# Allegro board FIBER-E1-PWR_01v2.brd
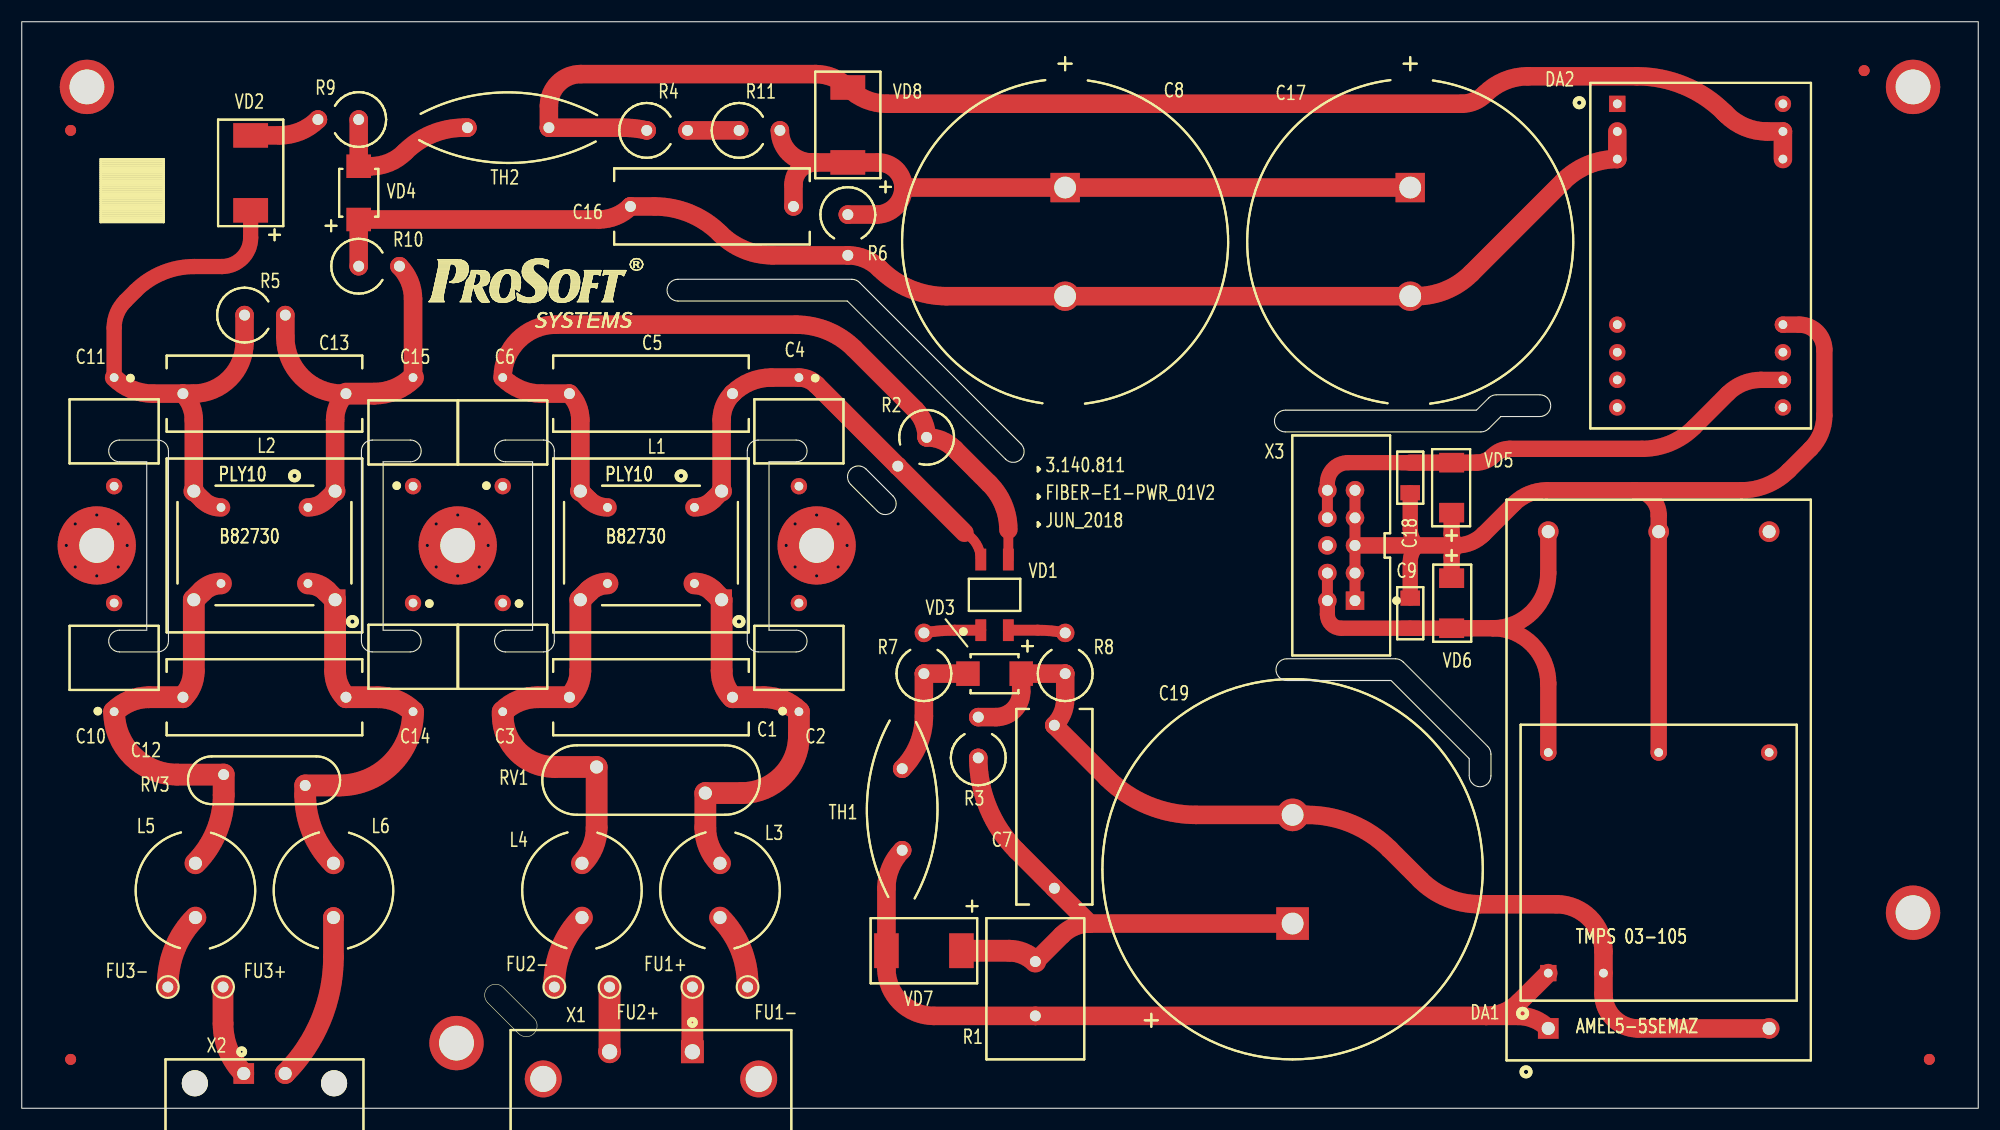
[diagram p0: board, top side]
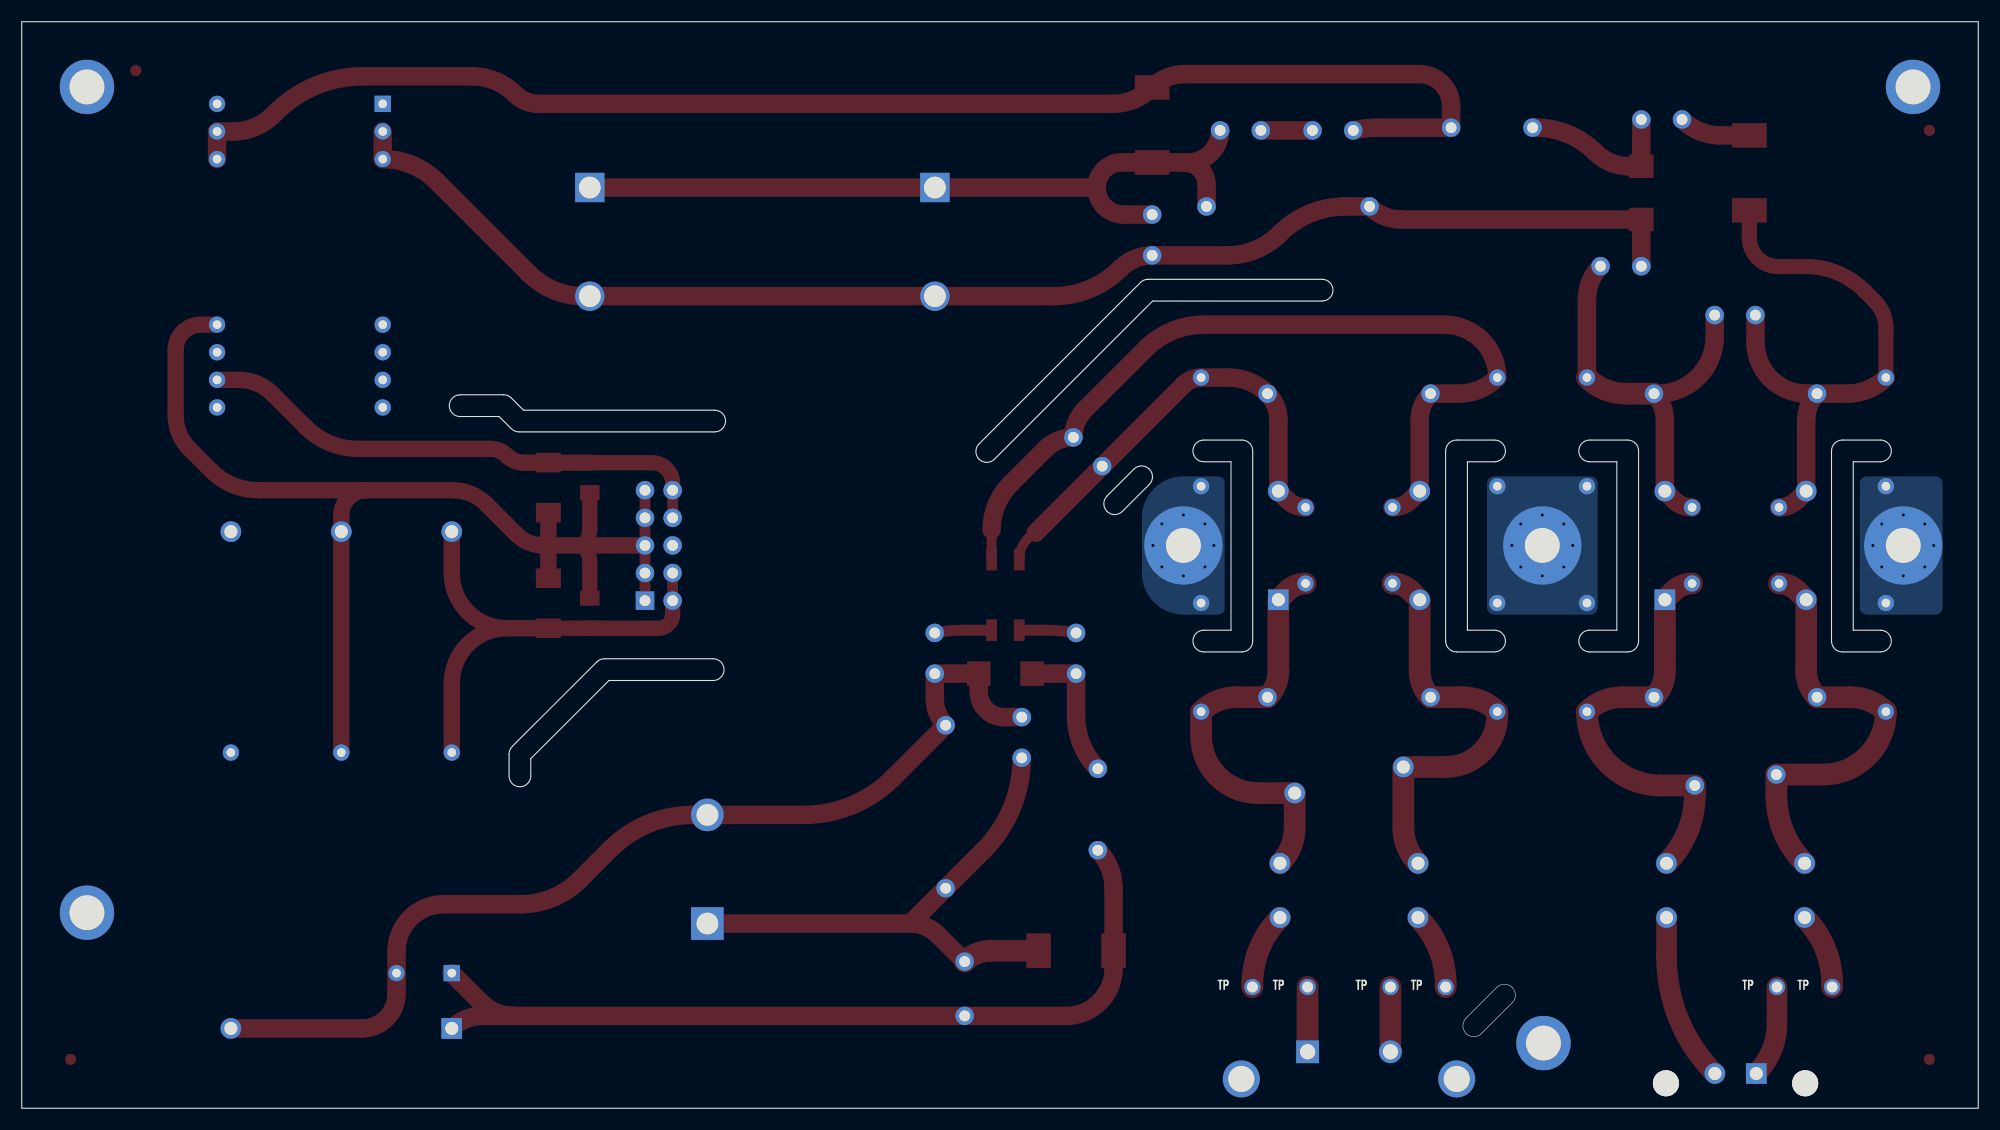
[diagram p1: board, bottom side, seen from below]

Outline 180 x 100 mm; copper layers: TOP, BOTTOM. Coordinates in mm from the lower left corner of the outline.
Outline path: rectangle 0,0 180,100 ; 9,61.5 12.5,61.5 arc(13.21,61.21) 13.5,60.5 13.5,43 arc(13.21,42.29) 12.5,42 9,42 arc(8,43) 9,44 11.5,44 11.5,59.5 9,59.5 arc(8,60.5) 9,61.5 ; 31.25,60.5 arc(31.54,61.21) 32.25,61.5 35.75,61.5 arc(36.75,60.5) 35.75,59.5 33.25,59.5 33.25,44 35.75,44 arc(36.75,43) 35.75,42 32.25,42 arc(31.54,42.29) 31.25,43 31.25,60.5 ; 42.88,11.12 arc(43.59,11.41) 44.29,11.12 47.12,8.29 arc(47.41,7.59) 47.12,6.88 arc(46.41,6.59) 45.71,6.88 42.88,9.71 arc(42.59,10.41) 42.88,11.12 ; 44.5,61.5 48,61.5 arc(48.71,61.21) 49,60.5 49,43 arc(48.71,42.29) 48,42 44.5,42 arc(43.5,43) 44.5,44 47,44 47,59.5 44.5,59.5 arc(43.5,60.5) 44.5,61.5 ; 60.37,76.3 76.37,76.3 arc(76.76,76.22) 77.09,75.99 91.92,61.15 arc(92.22,60.45) 91.92,59.74 arc(91.22,59.45) 90.51,59.74 75.95,74.3 60.37,74.3 arc(59.37,75.3) 60.37,76.3 ; 66.75,60.5 arc(67.04,61.21) 67.75,61.5 71.25,61.5 arc(72.25,60.5) 71.25,59.5 68.75,59.5 68.75,44 71.25,44 arc(72.25,43) 71.25,42 67.75,42 arc(67.04,42.29) 66.75,43 66.75,60.5 ; 76.27,58.83 arc(76.97,59.12) 77.68,58.83 80.16,56.35 arc(80.45,55.64) 80.16,54.94 arc(79.45,54.64) 78.74,54.94 76.27,57.41 arc(75.97,58.12) 76.27,58.83 ; 116.25,64.25 133.84,64.25 134.94,65.36 arc(135.27,65.58) 135.66,65.66 139.66,65.66 arc(140.66,64.66) 139.66,63.66 136.08,63.66 134.97,62.55 arc(134.64,62.33) 134.25,62.25 116.25,62.25 arc(115.25,63.25) 116.25,64.25 ; 116.39,41.37 126.39,41.37 arc(126.78,41.29) 127.11,41.06 134.86,33.31 arc(135.09,32.98) 135.17,32.59 135.17,30.59 arc(134.17,29.59) 133.17,30.59 133.17,32.18 125.98,39.37 116.39,39.37 arc(115.39,40.37) 116.39,41.37

## Design rules (mm)
nets with their own width: min track width 2; nets GND_EARTH

## Placement (name value [footprint] x y rotation side)
C1  0.22uF  [CAPRR1500W80L1800T700H1250N]  57.89 37.83 0 top
C2  470pF  [CAPRR1000W55L700T400H700N]  71.5 41.5 90 top
C3  470pF  [CAPRR1000W55L700T400H700N]  44.25 41.5 270 top
C4  470pF  [CAPRR1000W55L700T400H700N]  71.5 62.25 270 top
C5  0.22uF  [CAPRR1500W80L1800T700H1250N]  57.89 65.77 0 top
C6  470pF  [CAPRR1000W55L700T400H700N]  44.25 62.25 90 top
C7  0.22uF  [CAPRR1500W80L1800T700H1250N]  95 27.75 270 top
C8  4700uF  [CAPPRR1000W150L3000T3000H4000N]  95.99 79.74 270 top
C9  1uF  [CAPC3216X150N]  127.74 45.56 90 top
C10  470pF  [CAPRR1000W55L700T400H700N]  8.5 41.5 90 top
C11  470pF  [CAPRR1000W55L700T400H700N]  8.5 62.25 270 top
C12  0.22uF  [CAPRR1500W80L1800T700H1250N]  22.33 37.83 180 top
C13  0.22uF  [CAPRR1500W80L1800T700H1250N]  22.33 65.77 180 top
C14  470pF  [CAPRR1000W55L700T400H700N]  36 41.5 270 top
C15  470pF  [CAPRR1000W55L700T400H700N]  36 62.25 90 top
C16  0.22uF  [CAPRR1500W80L1800T700H1250N]  63.5 83 0 top
C17  4700uF  [CAPPRR1000W150L3000T3000H4000N]  127.74 79.74 270 top
C18  1uF  [CAPC3216X150N]  127.74 58.03 270 top
C19  470uF  [CAPPRR1000W55L3500T3500H5000N]  116.92 22 90 top
DA1  AMEL5-5SEMAZ  [DIP1016P5228X1780-5N]  150.6 30.21 90 top
DA2  AM3T-4805SH35Z  [DIP254P1524X1020-24N]  154.41 78.47 0 top
FIBER-E1-PWR_01V2  SILK_TEXT  [TEXT]  93.98 55.88 0 top
FU1+  TP  [KP_W150H100]  61.7 11.16 0 top
FU1-  TP  [KP_W150H100]  66.78 11.16 0 top
FU2+  TP  [KP_W150H100]  54.08 11.16 0 top
FU2-  TP  [KP_W150H100]  49 11.16 0 top
FU3+  TP  [KP_W150H100]  18.52 11.16 0 top
FU3-  TP  [KP_W150H100]  13.44 11.16 0 top
JUN_2018  SILK_TEXT  [TEXT]  93.98 53.34 0 top
L1  1m  [FIL_PLY10]  57.89 51.8 180 top
L2  1m  [FIL_PLY10]  22.33 51.8 180 top
L3  22uH  [INDRR500W65L1100T1100H1150N]  64.24 20.05 90 top
L4  22uH  [INDRR500W65L1100T1100H1150N]  51.54 20.05 90 top
L5  22uH  [INDRR500W65L1100T1100H1150N]  15.98 20.05 90 top
L6  22uH  [INDRR500W65L1100T1100H1150N]  28.68 20.05 90 top
MH1  3.2  [MTG720H320]  6.9 51.8 0 top
MH2  3.2  [MTG720H320]  40.11 51.8 0 top
MH3  3.2  [MTG720H320]  73.13 51.8 0 top
NOREF  -  [unnamed]  40 6 0 top
NOREF#2  -  [unnamed#2]  169.5 95.5 0 top
NOREF#3  -  [#3]  40 6 90 top
NOREF#4  -  [unnamed#2]  4.5 4.5 0 top
NOREF#5  -  [#3]  40 6 0 top
NOREF#6  -  [#3]  121.39 51.8 90 top
NOREF#7  -  [unnamed]  6 94 0 top
NOREF#8  -  [unnamed]  174 18 0 top
NOREF#9  -  [#3]  174 18 90 top
NOREF#10  -  [#3]  6 94 0 top
NOREF#11  -  [unnamed#2]  175.5 4.5 0 top
NOREF#12  -  [#3]  121.39 51.8 0 top
NOREF#13  -  [#3]  0 0 90 top
NOREF#14  -  [#3]  70.8 -4.8 90 top
NOREF#15  -  [unnamed]  174 94 0 top
NOREF#16  -  [#3]  0 100 0 top
NOREF#17  -  [unnamed#2]  4.5 90 0 top
NOREF#18  -  [#3]  6 94 90 top
R1  5.1k  [RESAD500W80L1300D900N]  93.25 11 270 top
R2  1M  [RESAD2000W60L1550D500N]  83.25 61.75 45 top
R3  1M  [RESAD2000W60L1550D500N#2]  88 32.25 270 top
R4  510  [RESAD2250W80L1600D505N]  57.5 90 180 top
R5  1M  [RESAD2000W60L1550D500N#2]  20.5 73 180 top
R6  1M  [RESAD2000W60L1550D500N#2]  76 82.25 90 top
R7  510  [RESAD2250W80L1600D505N]  83 40 270 top
R8  510  [RESAD2250W80L1600D505N]  96 40 270 top
R9  5.1  [RESAD2250W80L1600D505N]  31 91 0 top
R10  5.1  [RESAD2250W80L1600D505N]  31 77.5 180 top
R11  510  [RESAD2250W80L1600D505N]  66 90 180 top
RV1  JVR-20N391K  [VAR_JVR-20N391K]  57.89 30.21 180 top
RV3  JVR-14N820K  [VAR_JVR-14N820K]  22.33 30.21 0 top
SILK1  SILK_LOGO  [PROSOFT_LOGO_20X6_LINES]  36.83 71.12 0 top
SILK2  SILK_MARK  [MARKING_STICKER_6X6MM_LINES]  10.16 84.45 0 top
TH1  7  [RESRB750W80L1750T650H2300]  81 27.5 90 top
TH2  7  [RESRB750W80L1750T650H2300]  44.75 90.25 180 top
UNK3.140.811  SILK_TEXT  [TEXT]  93.98 58.42 0 top
VD1  MB8S  [SOIC254P670X270-4N]  89.5 47.25 90 top
VD2  S3M  [DIOM7959X265N]  21.06 86.09 270 top
VD3  P6SMB400A  [DIOM5436X230N]  89.5 40 0 top
VD4  SMBJ48A  [DIOM5436X260N]  31 84.25 270 top
VD5  SM6T6V8A  [DIOM5336X265N]  131.55 57.12 270 top
VD6  SM6T6V8A  [DIOM5336X265N]  131.55 46.48 90 top
VD7  S3M  [DIOM7959X265N]  83 14.5 0 top
VD8  S3M  [DIOM7959X265N]  76 90.5 270 top
X1  220VAC  [PHOENIX_1806229]  61.7 5.2 0 top
X2  48VDC  [PHOENIX_1827868]  20.43 3.2 0 top
X3  IDC-10M  [SHDR0S254P5X2_2025X900X900]  122.66 46.72 90 top

## Library data of the parts
C1-C7 C9-C16 C18 = CAPACITOR
C8 C17 C19 = CAPACITOR_POL
DA1 = AMEL5_xSxMAZ_2
DA2 = AM3T_SH35Z_3
FIBER-E1-PWR_01V2 JUN_2018 UNK3.140.811 = SILK_TEXT
FU1+ FU1- FU2+ FU2- FU3+ FU3- = TP
L1 L2 = PLY10_1
L3-L6 = INDUCTOR
MH1-MH3 = MH_VIAS
R1 = R_5W
R2 R3 R5 R6 = R_0: alternate symbols: (RESAD375W80L505D505N)
R4 R7-R11 = R_2W: alternate symbols: (RESAD375W80L505D505N)
RV1 RV3 = VARISTOR
SILK1 = SILK_LOGO: alternate symbols: (PROSOFT_LOGO_3_10,PROSOFT_LOGO_30X10,PROSOFT_LOGO_50X16,PROSOFT_LOGO_60X20,PROSOFT_LOGO_70X23,PROSOFT_LOGO_80X26,PROSOFT_LOGO_92X30,PROSOFT_LOGO_20X6)
SILK2 = SILK_MARK: alternate symbols: (MARKING_STICKER_6X20MM,MARKING_STICKER_6X20MM_LINES,MARKING_STICKER_6X6MM,MARKING_STICKER_7X7MM)
TH1 TH2 = thermistor
VD1 = DIOD_MOST_MB8S
VD2 VD7 VD8 = DIODE
VD3 = SUPRESSOR_POL_0
VD4 = SUPRESSOR_POL_2
VD5 VD6 = SUPRESSOR_POL
X1 = CONN2_SHIELD_3
X2 = CONN2_3
X3 = CONN10: alternate symbols: (IDC10M_EDGE)

## Footprints (pads in the part's own frame, mm; a bottom-side part is the same pattern mirrored in y, then rotated)
CAPC3216X150N
  rect 1.4x1.8 smd: 1(-1.385,0) 2(1.385,0)
CAPPRR1000W55L3500T3500H5000N
  rect 3x3 hole 2: 1(-5,0)
  round 3 hole 2: 2(5,0)
CAPPRR1000W150L3000T3000H4000N
  rect 2.7x2.7 hole 2: 1(-5,0)
  round 2.7 hole 2: 2(5,0)
CAPRR1000W55L700T400H700N
  round 1.5 hole 0.8: 1(-5,0) 2(5,0)
CAPRR1500W80L1800T700H1250N
  round 1.7 hole 1: 1(-7.5,0) 2(7.5,0)
DIOM5336X265N
  rect 1.8x2.3 smd: 1(-2.302,0) 2(2.302,0)
DIOM5436X230N
  rect 2.16x2.26 smd: 1(-2.45,0) 2(2.45,0)
DIOM5436X260N
  rect 2.16x2.26 smd: 1(-2.45,0) 2(2.45,0)
DIOM7959X265N
  rect 2.26x3.2 smd: 1(-3.45,0) 2(3.45,0)
DIP254P1524X1020-24N
  rect 1.5x1.5 hole 0.8: 1(-7.62,13.97)
  round 1.5 hole 0.8: 2(-7.62,11.43) 3(-7.62,8.89) 9(-7.62,-6.35) 10(-7.62,-8.89) 11(-7.62,-11.43) 12(-7.62,-13.97) 13(7.62,-13.97) 14(7.62,-11.43) 15(7.62,-8.89) 16(7.62,-6.35) 22(7.62,8.89) 23(7.62,11.43) 24(7.62,13.97)
DIP1016P5228X1780-5N
  rect 1.9x1.9 hole 1.2: 1(-22.86,10.16)
  rect 1.5x1.5 hole 0.8: 1-1(-17.77,10.16)
  round 1.9 hole 1.2: 2(-22.86,-10.16) 3(22.86,10.16) 4(22.86,0) 5(22.86,-10.16)
  round 1.5 hole 0.8: 2-1(-17.77,5.08) 3-1(2.53,-10.16) 4-1(2.53,0) 5-1(2.53,10.16)
FIL_PLY10
  rect 1.9x1.9 hole 1.2: 1(-6.5,5)
  round 1.5 hole 0.8: 1-1(-4,-3.5) 2-1(4,-3.5) 3-1(4,3.5) 4-1(-4,3.5)
  round 1.9 hole 1.2: 2(-6.5,-5) 3(6.5,-5) 4(6.5,5)
INDRR500W65L1100T1100H1150N
  round 1.9 hole 1.2: 1(-2.5,0) 2(2.5,0)
KP_W150H100
  round 1.5 hole 1: 1(0,0)
MTG720H320
  round 7.2 hole 3.2: 1(0,0)
PHOENIX_1806229
  rect 2.1x2.1 hole 1.4: 1(0,0)
  round 2.1 hole 1.4: 2(-7.62,0)
  round 3.4 hole 2.4: SHIELD1(-13.72,-2.5) SHIELD2(6.1,-2.5)
PHOENIX_1827868
  round 2.4 hole 2.4 unplated: (-4.5,-0.9) (8.31,-0.9)
  rect 1.9x1.9 hole 1.2: 1(0,0)
  round 1.9 hole 1.2: 2(3.81,0)
RESAD500W80L1300D900N
  round 1.7 hole 1: 1(-2.5,0) 2(2.5,0)
RESAD2000W60L1550D500N
  round 1.7 hole 1: 1(-3.75,0) 2(0,0)
RESAD2000W60L1550D500N#2
  round 1.7 hole 1: 1(-3.75,0) 2(0,0)
RESAD2250W80L1600D505N
  round 1.7 hole 1: 1(-3.75,0) 2(0,0)
RESRB750W80L1750T650H2300
  round 1.7 hole 1: 1(-3.75,0) 2(3.75,0)
SHDR0S254P5X2_2025X900X900
  rect 1.7x1.7 hole 1: 1(0,0)
  round 1.7 hole 1: 2(0,2.54) 3(2.54,0) 4(2.54,2.54) 5(5.08,0) 6(5.08,2.54) 7(7.62,0) 8(7.62,2.54) 9(10.16,0) 10(10.16,2.54)
SOIC254P670X270-4N
  rect 2x1 smd: 1(-3.25,1.27) 2(-3.25,-1.27) 3(3.25,-1.27) 4(3.25,1.27)
unnamed
  round 5 hole 3.2: 1(0,0)
unnamed#2
  round 1 smd: (0,0) (0,0)
VAR_JVR-14N820K
  round 1.7 hole 1: 1(-3.75,0.5) 2(3.75,-0.5)
VAR_JVR-20N391K
  round 1.9 hole 1.2: 1(-5,1.2) 2(5,-1.2)

## Nets
GND: C9.2 C18.2 DA1.4(-VOUT) DA1.4-1 DA2.16(-VOUT) VD5.2(ANODE) VD6.2(ANODE) X3.1 X3.3 X3.5 X3.7 X3.9
GND_EARTH: C2.2 C3.1 C4.2 C6.1 C10.2 C11.2 C14.1 C15.1 MH1.1 MH2.1 MH3.1
3-1: DA1.3-1
N1859833: FU1+.1 X1.1(-)
N1859855: C1.2 C2.1 L1.1 L1.4-1 L3.2 RV1.1
N1859873: C1.1 C3.2 L1.3-1 L1.4 L4.2 RV1.2
N1860629: C4.1 C5.2 L1.1-1 L1.2 R2.1 VD1.4(IN2)
N1860633: C5.1 C6.2 L1.2-1 L1.3 R2.2 VD1.3(IN1)
N1861955: C7.1 C19.2 DA1.2(AC_L) DA1.2-1 R3.1 R8.2 VD3.2(ANODE)
N1862066: DA1.1(AC_N) DA1.1-1 R1.2 TH1.1 VD7.1(CATHODE)
N1862585: C9.1 DA1.3(+VOUT) DA1.5-1 VD6.1(CATHODE) X3.2 X3.4
N1866469: C18.1 DA2.14(+VOUT) VD5.1(CATHODE) X3.8 X3.10
N1869514: C11.1 C13.2 L2.2-1 L2.3 R5.2 VD2.2(ANODE)
N1869554: C8.1 C16.2 C17.1 R6.2 R11.1 VD8.2(ANODE)
N1869574: C8.2 C16.1 C17.2 DA2.2(-V IN#2) DA2.3(-V IN#3) R6.1 R10.2 VD4.2(ANODE)
N1869642: DA2.22(+V IN#22) DA2.23(+V IN#23) R4.2 TH2.1 VD8.1(CATHODE)
N1869794: C10.1 C12.2 L2.3-1 L2.4 L5.2 RV3.1
N1869810: C12.1 C14.2 L2.1 L2.4-1 L6.2 RV3.2
N1869998: C13.1 C15.2 L2.1-1 L2.2 R5.1 R10.1
N1874089: FU1-.1 L3.1
N1874294: FU2+.1 X1.2(+)
N1874423: FU3+.1 X2.1(+)
N1874427: FU3-.1 L5.1
N1874451: L6.1 X2.2(-)
N1877590: R9.1 VD2.1(CATHODE)
N1878411: R7.2 TH1.2 VD3.1(CATHODE)
N1878415: R7.1 VD1.1(+)
N1878419: R8.1 VD1.2(-)
N1878478: R9.2 TH2.2 VD4.1(CATHODE)
N1898564: FU2-.1 L4.1
N1905384: C7.2 C19.1 R1.1 R3.2 VD7.2(ANODE)
N19088750: R4.1 R11.2

Pads without a net: DA1 5; DA2 1 9 10 11 12 13 15 24; NOREF 1; NOREF#7 1; NOREF#8 1; NOREF#15 1; X1 SHIELD1 SHIELD2; X3 6

## Via types
v1: diameter 0.8, hole 0.3, TOP to BOTTOM, 24 vias

## Routing (per net, layer and track width the routed paths; a pad name or vN(x,y) marks a point on that pad's centre or on a via; arc(x,y) is an arc through that point)
GND: length 111.5
  TOP w1: X3.1 X3.3 X3.5 X3.7 X3.9
  TOP w1.4: C9.2 127.74,50.27 arc(127.91,51.1) 128.38,51.8 arc(127.91,52.5) 127.74,53.33 C18.2
  TOP w1.5: 132,51.8 X3.5 ; 132,51.8 arc(131.67,52.3) 131.55,52.89 VD5.2 ; 132,51.8 arc(131.67,51.3) 131.55,50.71 VD6.2 ; 132,51.8 arc(133.34,52.07) 134.48,52.83 137.26,55.61 arc(138.67,56.55) 140.33,56.88 148.29,56.88 ; 148.29,56.88 158.22,56.88 arc(160.57,57.35) 162.56,58.68 164.57,60.69 arc(165.51,62.1) 165.84,63.76 165.84,69.81 arc(165.16,71.44) 163.53,72.12 DA2.16 ; 148.29,56.88 arc(149.92,56.2) 150.6,54.57 DA1.4 DA1.4-1
GND_EARTH:
  vias: v1(4.1,51.8) v1(4.92,53.78) v1(4.92,49.82) v1(6.9,54.6) v1(6.9,49) v1(8.88,53.78) v1(8.88,49.82) v1(9.7,51.8) v1(37.31,51.8) v1(38.13,53.78) v1(38.13,49.82) v1(40.11,54.6) v1(40.11,49) v1(42.09,53.78) v1(42.09,49.82) v1(42.91,51.8) v1(70.33,51.8) v1(71.15,53.78) v1(71.15,49.82) v1(73.13,54.6) v1(73.13,49) v1(75.11,53.78) v1(75.11,49.82) v1(75.93,51.8)
N1859833: length 6
  TOP w2: X1.1 FU1+.1
N1859855: length 39.4
  TOP w2: L3.2 arc(63.24,24.05) 62.89,25.81 RV1.1 66.25,29.01 arc(69.96,30.55) 71.5,34.26 C2.1 arc(70.03,37.48) 68.29,37.83 C1.2 arc(64.65,38.94) 64.39,40.24 L1.1 63.6,47.59 arc(62.81,48.12) L1.4-1
N1859873: length 39.7
  TOP w2: L4.2 arc(52.54,24.05) 52.89,25.81 RV1.2 49,31.41 arc(45.64,32.8) 44.25,36.16 C3.2 arc(45.72,37.48) 47.46,37.83 C1.1 arc(51.13,38.94) 51.39,40.24 L1.4 52.18,47.59 arc(52.97,48.12) L1.3-1
N1860629: length 42.8
  TOP w0.9: VD1.4 arc(87.82,51.95) 86.72,52.97
  TOP w1.7: 86.72,52.97 R2.1 73.11,66.58 arc(72.37,67.08) C4.1 68.96,67.25 arc(67.03,66.87) C5.2 arc(64.65,64.66) 64.39,63.36 L1.2 63.6,56.01 arc(62.81,55.48) L1.1-1
N1860633: length 80.1
  TOP w0.9: 90.77,53.25 VD1.3
  TOP w1.7: 90.77,53.25 arc(90.31,55.54) 89.02,57.48 85.81,60.69 arc(84.64,61.47) R2.2 arc(82.97,63.14) 82.19,64.31 76.59,69.91 arc(74.14,71.54) 71.25,72.12 49.12,72.12 arc(45.68,70.69) C6.2 arc(45.89,66.15) 47.82,65.77 C5.1 arc(51.13,64.66) 51.39,63.36 L1.3 52.18,56.01 arc(52.97,55.48) L1.2-1
N1861955: length 95.5
  TOP w1.7: DA1.2 148.69,7.35 arc(146.45,8.28) 145.52,10.53 DA1.2-1 145.52,14.44 arc(144.25,17.51) 141.18,18.78 134.09,18.78 arc(131.16,19.36) 128.67,21.02 125.83,23.86 arc(122.36,26.18) 118.25,27 C19.2 108.06,27 arc(103.62,27.88) 99.85,30.4 C7.1 arc(95.74,36.36) 96,37.66 R8.2 VD3.2 91.95,38.31 arc(91.27,36.68) 89.64,36 R3.1
N1862066: length 82.1
  TOP w1.7: 134.72,8.5 R1.2 83.92,8.5 arc(80.83,9.78) 79.55,12.88 VD7.1 79.55,20.25 arc(79.93,22.14) TH1.1 ; 134.72,8.5 137.66,8.5 arc(139.17,8.2) DA1.1 ; 134.72,8.5 arc(136.36,8.83) 137.75,9.76 DA1.1-1
N1862585: length 45.9
  TOP w1: X3.4 X3.2
  TOP w1.4: X3.2 120.12,45.45 arc(120.49,44.55) 121.39,44.18 C9.1 VD6.1
  TOP w1.5: 135.36,44.18 VD6.1 ; 135.36,44.18 arc(138.95,45.67) 140.44,49.26 DA1.3 ; 135.36,44.18 arc(138.95,42.69) 140.44,39.1 DA1.5-1
N1866469: length 48.7
  TOP w1: X3.10 X3.8
  TOP w1.4: C18.1 122.03,59.42 arc(120.68,58.86) 120.12,57.52 X3.10
  TOP w1.5: C18.1 VD5.1 133.83,59.42 arc(134.66,59.59) 135.36,60.05 arc(136.06,60.52) 136.89,60.69 149.07,60.69 arc(151.66,61.21) 153.85,62.67 156.95,65.77 arc(158.36,66.71) 160.02,67.04 DA2.14
N1869514: length 53.7
  TOP w1.4: VD2.2 21.06,80.11 arc(20.29,78.24) 18.41,77.47 15.88,77.47 arc(12.94,76.89) 10.46,75.22 9.53,74.3 arc(8.77,73.16) 8.5,71.82 C11.1
  TOP w1.7: R5.2 20.5,70.5 arc(19.11,67.16) 15.77,65.77 C13.2 ; C13.2 12.07,65.77 arc(10.14,66.15) C11.1 ; C13.2 arc(15.57,64.66) 15.83,63.36 L2.3 16.62,56.01 arc(17.41,55.48) L2.2-1
N1869554: length 72.7
  TOP w1.7: R6.2 78.62,82.25 arc(80.38,82.98) 81.11,84.74 ; C16.2 71,85 arc(71.6,86.45) 73.05,87.05 ; 73.05,87.05 72.7,87.05 arc(70.61,87.91) R11.1 ; 73.05,87.05 VD8.2 78.8,87.05 arc(80.43,86.37) 81.11,84.74 ; 81.11,84.74 C8.1 C17.1
N1869574: length 129.8
  TOP w1.7: R10.2 VD4.2 53.1,81.8 arc(54.67,82.11) C16.1 58.21,83 arc(61.48,82.35) 64.25,80.5 arc(66.47,79.02) 69.08,78.5 R6.1 arc(77.58,78.19) 78.92,77.29 arc(81.74,75.4) 85.08,74.74 C8.2 C17.2 128.29,74.74 arc(131.03,75.28) 133.35,76.83 141.81,85.3 arc(144.1,86.82) DA2.3 DA2.2
N1869642: length 131.6
  TOP w1.7: DA2.22 DA2.23 160.56,89.9 arc(158.55,90.3) 156.84,91.44 156.64,91.65 arc(152.95,94.11) 148.59,94.98 138.57,94.98 arc(136.43,94.56) 134.62,93.34 arc(133.63,92.68) 132.46,92.45 79.62,92.45 arc(77.66,92.84) VD8.1 arc(74.64,94.86) 73.03,95.18 51.43,95.18 arc(49.36,94.32) 48.5,92.25 TH2.1 55.25,90.25 arc(56.38,90.19) R4.2
N1869794: length 41.2
  TOP w2: L2.3-1 arc(17.41,48.12) 16.62,47.59 L2.4 15.83,40.24 arc(15.57,38.94) C12.2 11.71,37.83 arc(9.97,37.48) C10.1 arc(10.2,32.41) 14.29,30.71 RV3.1 18.58,28.83 arc(17.9,25.43) L5.2
N1869810: length 40.4
  TOP w2: L6.2 arc(26.76,25.43) 26.08,28.83 RV3.2 29.21,29.71 arc(34.01,31.7) C14.2 arc(34.53,37.48) 32.79,37.83 C12.1 arc(29.09,38.94) 28.83,40.24 L2.1 28.04,47.59 arc(27.25,48.12) L2.4-1
N1869998: length 40
  TOP w1.7: R5.1 24.25,71 arc(25.78,67.3) 29.48,65.77 C13.1 arc(29.09,64.66) 28.83,63.36 L2.2 28.04,56.01 arc(27.25,55.48) L2.1-1 ; C15.2 36,74.48 arc(35.68,76.12) R10.1
  TOP w2: C13.1 32.43,65.77 arc(34.36,66.15) C15.2
N1874089: length 7.1
  TOP w2: FU1-.1 66.78,11.42 arc(66.12,14.74) L3.1
N1874294: length 6
  TOP w2: X1.2 FU2+.1
N1874423: length 8.5
  TOP w1.9: FU3+.1 18.52,7.8 arc(19.02,5.31) X2.1
N1874427: length 7.1
  TOP w2: FU3-.1 13.44,11.42 arc(14.1,14.74) L5.1
N1874451: length 15.5
  TOP w1.9: L6.1 28.68,13.93 arc(27.52,8.12) X2.2
N1877590: length 6.6
  TOP w1.7: VD2.1 23.73,89.54 arc(25.63,89.92) R9.1
N1878411: length 13.3
  TOP w1.7: VD3.1 R7.2 83,36.08 arc(82.48,33.47) TH1.2
N1878415: length 5.2
  TOP w1: VD1.1 85.83,44 arc(84.41,43.94) R7.1
N1878419: length 5.2
  TOP w1: VD1.2 93.45,44 arc(94.73,43.94) R8.1
N1878478: length 15.2
  TOP w1.7: TH2.2 40.68,90.25 arc(37.74,89.67) 35.25,88 arc(33.81,87.04) 32.11,86.7 VD4.1 R9.2
N1898564: length 7.1
  TOP w2: FU2-.1 49,11.42 arc(49.66,14.74) L4.1
N1905384: length 51
  TOP w1.7: R1.1 95.69,15.94 arc(96.86,16.72) 98.25,17 ; 98.25,17 C7.2 91.54,23.71 arc(88.92,27.63) R3.2 ; 98.25,17 C19.1
  TOP w2: VD7.2 90.84,14.5 arc(92.14,14.24) R1.1
N19088750: length 4.8
  TOP w1.7: R4.1 R11.2

## Copper pours and planes (outline as drawn; the poured copper is in the pictures)
GND_EARTH on BOTTOM: 3.28,46.09 3.47,45.64 3.92,45.45 10.27,45.45 10.71,45.64 10.9,46.09 10.9,57.52 10.71,57.96 10.27,58.15 3.92,58.15 3.47,57.96 3.28,57.52
GND_EARTH on BOTTOM: 35.03,46.09 35.22,45.64 35.66,45.45 44.55,45.45 45,45.64 45.19,46.09 45.19,57.52 45,57.96 44.55,58.15 35.66,58.15 35.22,57.96 35.03,57.52
GND_EARTH on BOTTOM: 69.32,46.09 69.51,45.64 69.95,45.45 73.13,45.45 75.82,46.57 76.94,49.26 76.94,54.34 75.82,57.03 73.13,58.15 69.95,58.15 69.51,57.96 69.32,57.52
